# Altium PCB AWSAM_5_Breakout.PcbDoc
Units mm, origin at the board's own origin, x right, y up, seen from the top; angles counter-clockwise.
Board outline 45 x 60 mm, 2 copper layers (Top Layer, Bottom Layer); 37 components, 41 nets, 162 pads, 0 vias.
Unrouted connection lines stored in the file: 87.
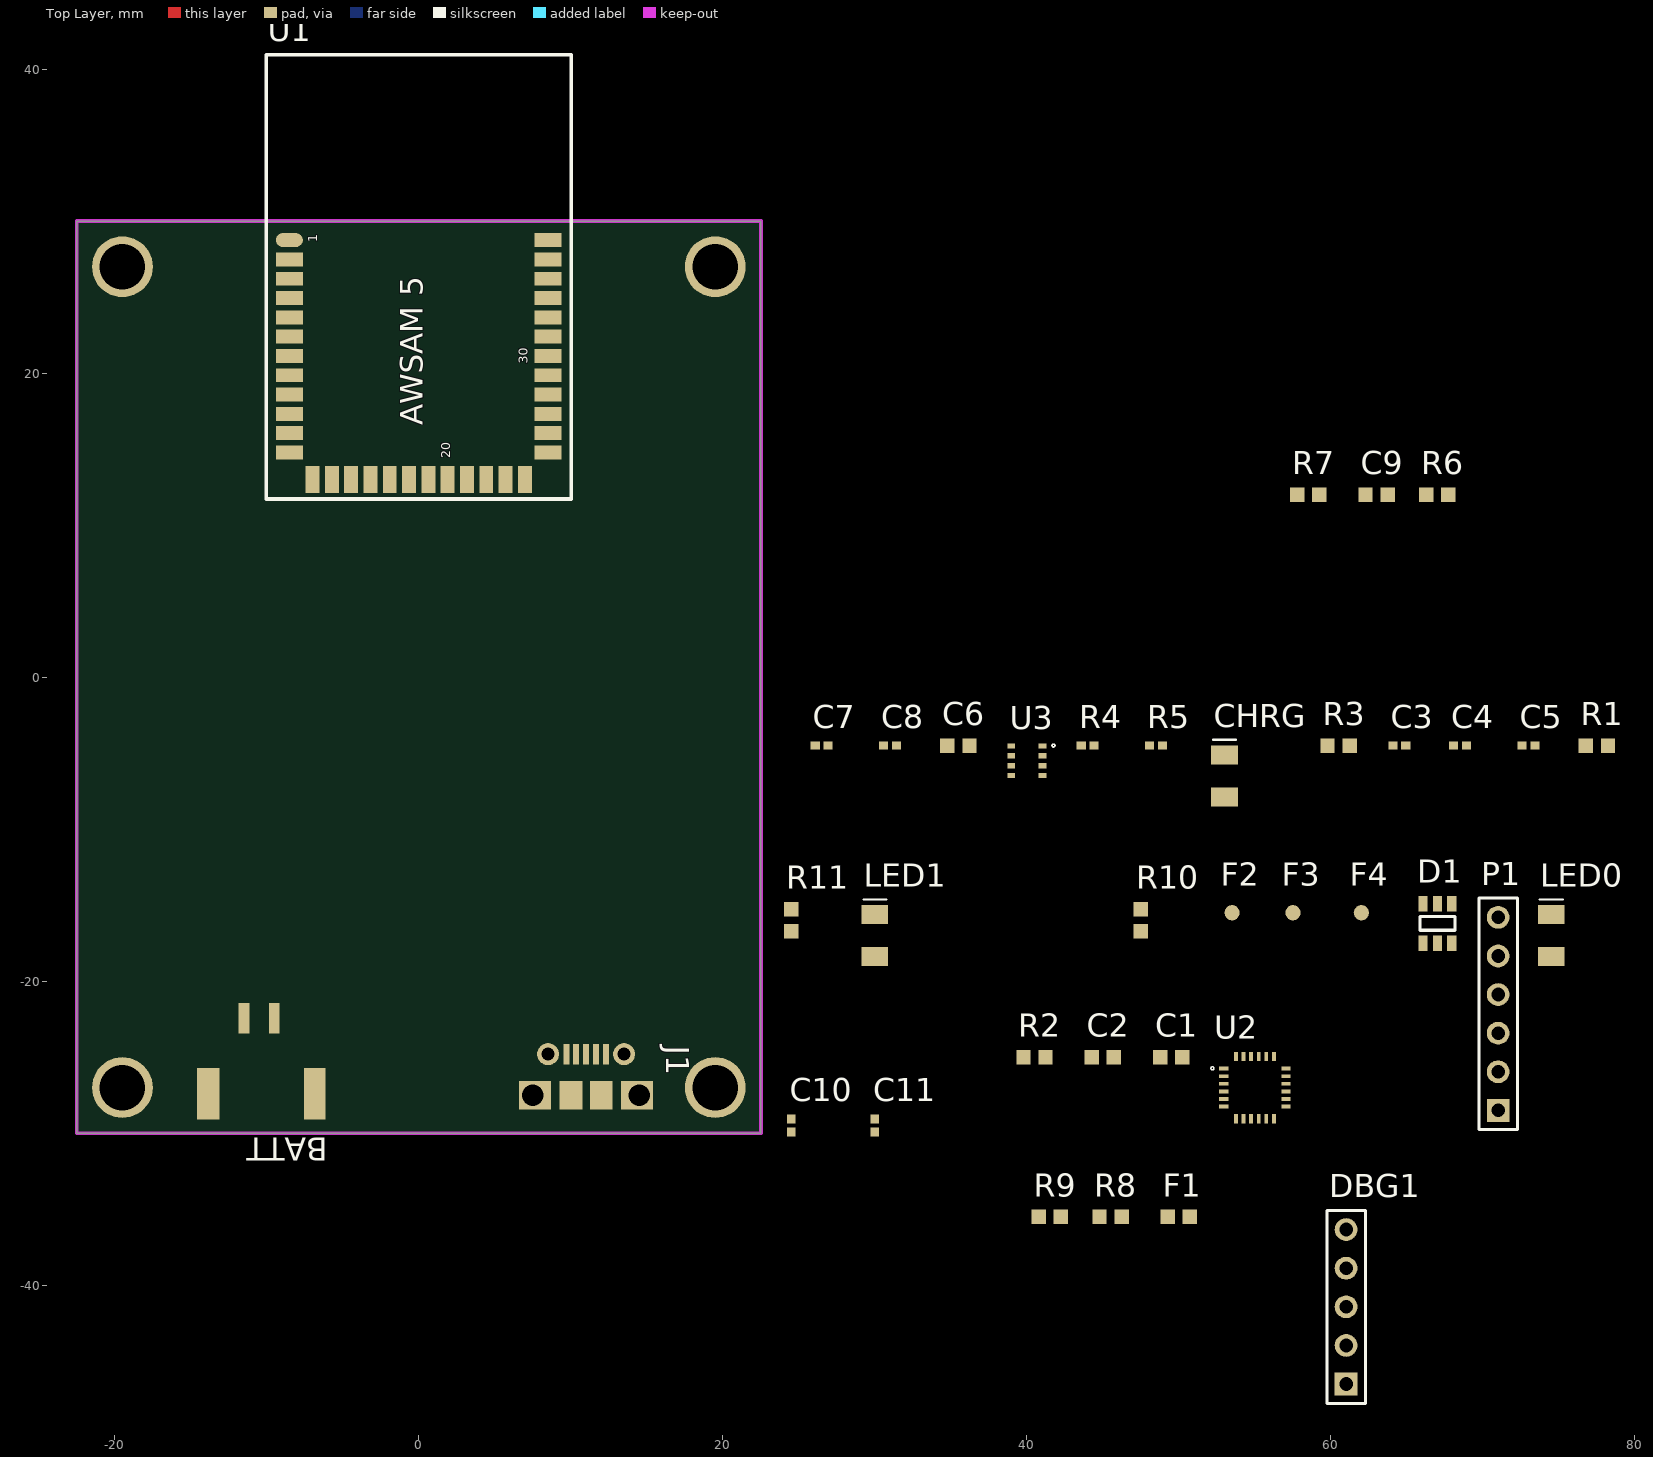
[diagram p0: Top Layer view]
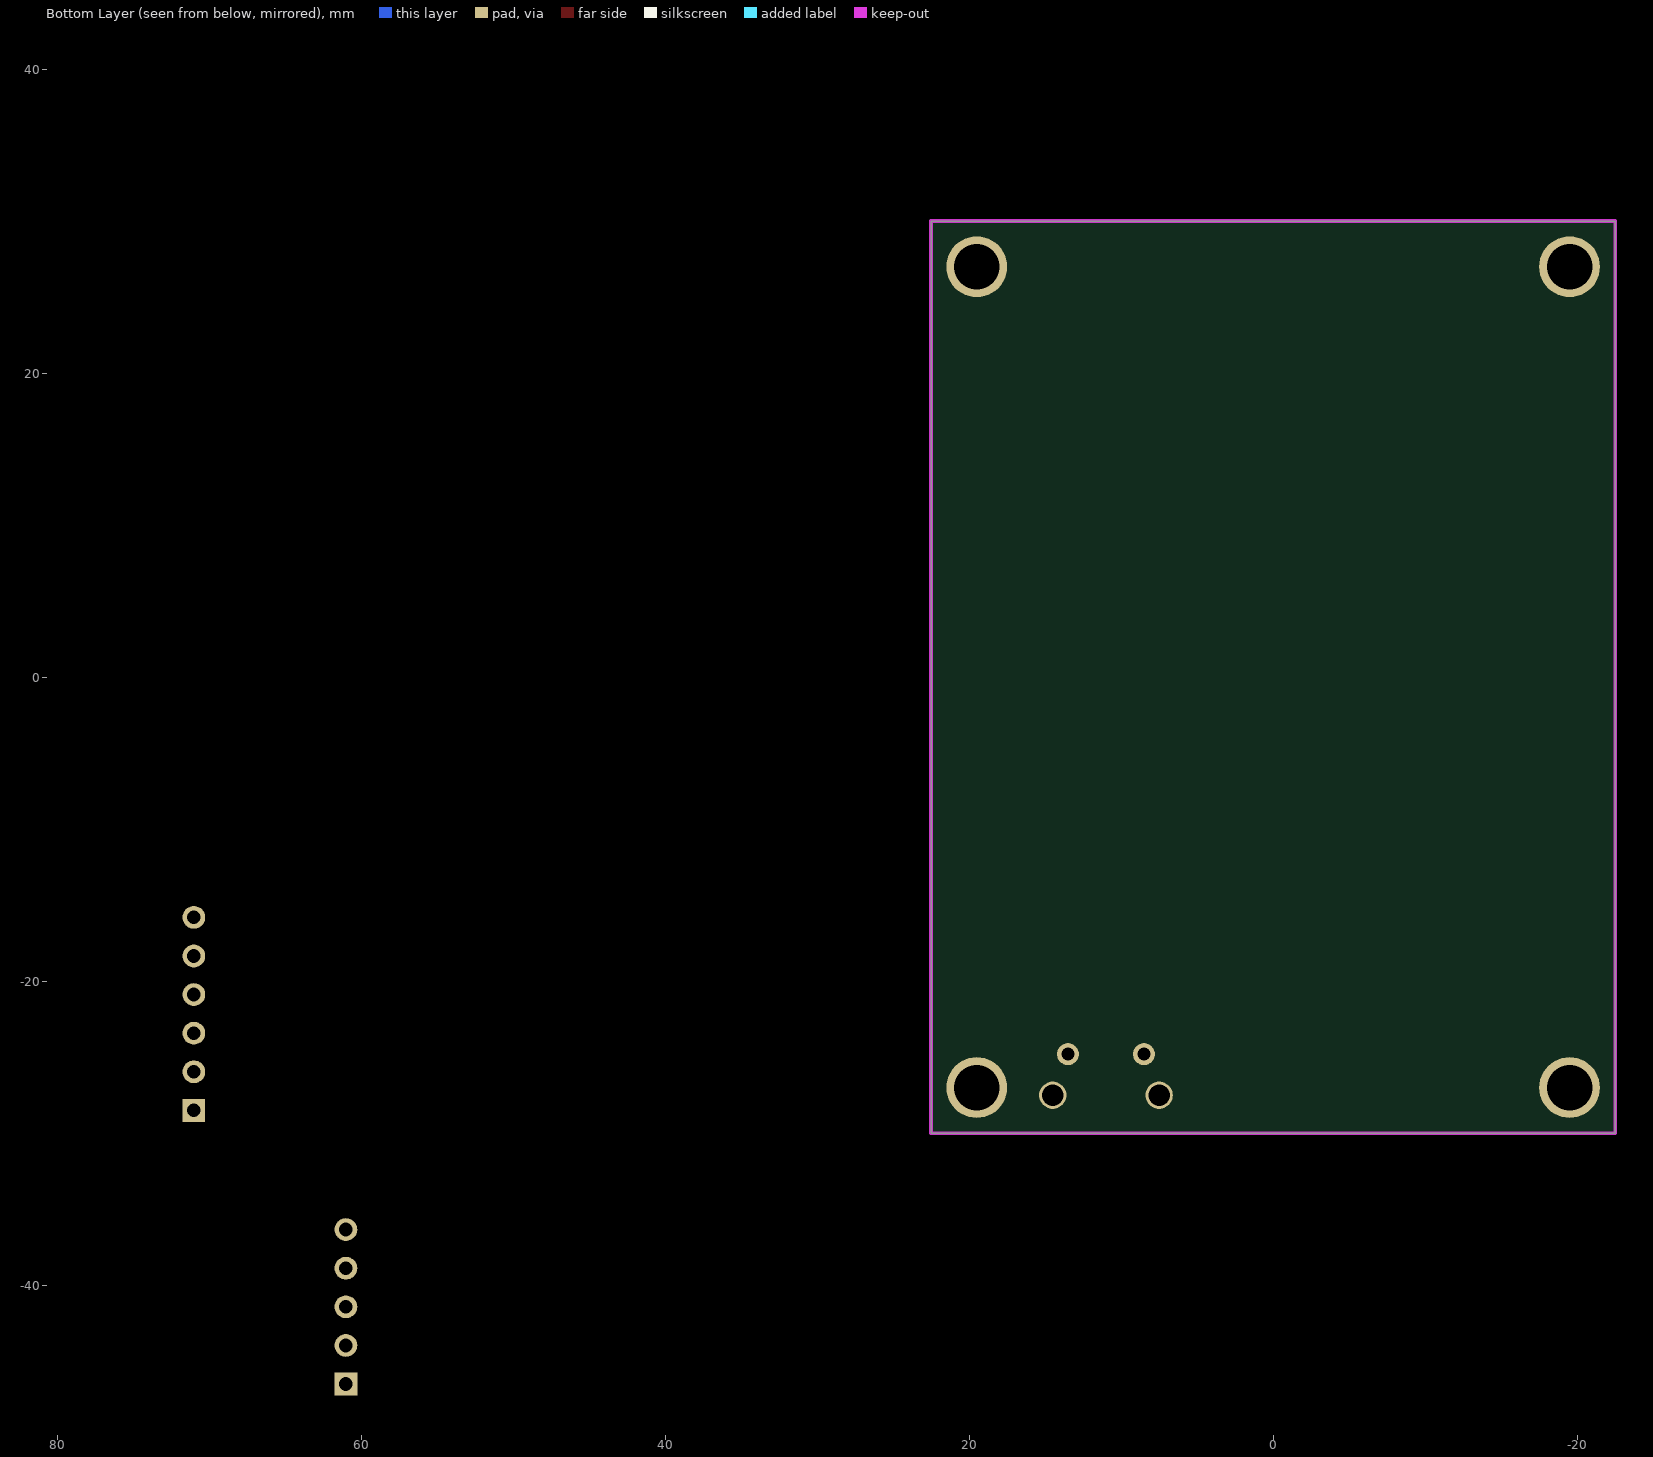
[diagram p1: Bottom Layer view, seen from below]

## Layer stack, top to bottom
Top Solder: solder mask 0.0102, Solder Resist, Dk 3.5
Top Layer: signal copper 0.0356
Dielectric 1: dielectric 0.32, FR-4, Dk 4.8
Bottom Layer: signal copper 0.0356
Bottom Solder: solder mask 0.0102, Solder Resist, Dk 3.5

## Board outline
-22.5,-30 22.5,-30 22.5,30 -22.5,30

## Design rules (kind name [scope] priority, off if disabled: settings)
Clearance [All] p1: gap=0.254
DiffPairsRouting [All] p1: maxlimit=0.254 minlimit=0.254 mostfreqgap=0.254 toplayer_minwidth=0.381 toplayer_maxwidth=0.381 toplayer_prefwidth=0.381 bottomlayer_minwidth=0.381 bottomlayer_maxwidth=0.381 bottomlayer_prefwidth=0.381 maxuncoupledlength=12.7
PolygonConnect [All] p1: connectstyle=Relief reliefconductorwidth=0.254 reliefentries=4 polygonreliefangle="90 Angle" airgapwidth=0.254
RoutingVias [All] p1: holewidth=0.711 width=1.27 viastyle="Through Hole" minholewidth=0.711 minwidth=1.27 maxholewidth=0.711 maxwidth=1.27
SolderMaskExpansion [All] p1: expansion=0.102
Width [All] p1: maxlimit=0.254 minlimit=0.254 preferedwidth=0.254
29 further rules are at their usual default settings.

## Classes and differential pairs
differential pair USB: +USB_P -USB_N

## Components (designator, comment, footprint, x,y, rotation, side; value= is the part's Value field where it differs from the comment)
BATT "JST-PH-2" JST-PH-2POS -10.5,-23.5 r180 top
C1 "CAP" CAP0603 49.499,-25 r0 top
C2 "CAP" CAP0603 44.999,-25 r0 top
C3 "CAP" CAP0402 64.5,-4.5 r0 top
C4 "CAP" CAP0402 68.5,-4.5 r0 top
C5 "CAP" CAP0402 73,-4.5 r0 top
C6 "CAP" CAP0603 35.5,-4.5 r0 top
C7 "CAP" CAP0402 26.5,-4.5 r0 top
C8 "CAP" CAP0402 31,-4.5 r0 top
C9 "CAP" CAP0603 63,12 r0 top
C10 "CAP" CAP0402 24.5,-29.5 r90 top
C11 "CAP" CAP0402 30,-29.5 r90 top
CHRG "RED" SMT1206-LED 53,-6.5 r90 top
D1 "SP0505BAHTG" SOT23-6 67,-17.5 r0 top
DBG1 "" HDR1X5 61,-46.5 r90 top
F1 "Ferrite" SMT0603 50,-35.5 r0 top
F2 "FIDUCIAL" FIDUCIAL-1MM 53.5,-15.5 r0 top
F3 "FIDUCIAL" FIDUCIAL-1MM 57.5,-15.5 r0 top
F4 "FIDUCIAL" FIDUCIAL-1MM 62,-15.5 r0 top
J1 "1050170001" 1050170001 11,-27.5 r0 top
LED0 "RED" SMT1206-LED 74.5,-17 r90 top
LED1 "RED" SMT1206-LED 30,-17 r90 top
P1 "Header 6" HDR1X6 71,-28.5 r90 top
R1 "RES" SMT0603 77.499,-4.5 r0 top
R2 "RES" SMT0603 40.499,-25 r0 top
R3 "Resistor" SMT0603 60.5,-4.5 r0 top
R4 "RES" SMT0402 44,-4.5 r0 top
R5 "RES" SMT0402 48.5,-4.5 r0 top
R6 "RES" SMT0603 67,12 r0 top
R7 "RES" SMT0603 58.5,12 r0 top
R8 "Resistor" SMT0603 45.5,-35.5 r0 top
R9 "Resistor" SMT0603 41.5,-35.5 r0 top
R10 "Resistor" SMT0603 47.5,-16 r90 top
R11 "Resistor" SMT0603 24.5,-16 r90 top
U1 "AWSAM_5" AWSAM_5 8.5,13 r90 top
U2 "MPU-9250" QFN24 54.999,-27 r0 top
U3 "BME280" BME280 40,-5.5 r0 top

## Footprints (in the part's own frame and the unit in brackets; to place one, negate y for a bottom-side part, rotate by r counter-clockwise, add the part's x,y. Pads: shape width x height; smd on the part's side, far side on the other; paste and mask are expansions set on the pad)
1050170001 [mm] "CONN USB MICRO MOLEX MODIFIED FOR DRILL HITS"
  round 1.8 hole 1.4: 0(-3.5,0) 0(3.5,0)
  rect 2.1x1.9 smd: 0(-3.35,0) 0(3.35,0)
  round 1.45 hole 0.85: 0(-2.5,2.7) 0(2.5,2.7)
  rect 1.5x1.9 smd: 0(-1,0) 0(1,0)
  rect 0.4x1.35 smd: 1(-1.3,2.7) 2(-0.65,2.7) 3(0,2.7) 4(0.65,2.7) 5(1.3,2.7)
  body extent -4.1,-2.5 4.1,2.9, height 2.78
AWSAM_5 [mil] "Footprint for AWSAM_5"
  oval 36x70 smd: 1(620,670)
  rect 36x70 smd: 2(570,670) 3(520,670) 4(470,670) 5(420,670) 6(370,670) 7(320,670) 8(270,670) 9(220,670) 10(170,670) 11(120,670) 12(70,670) 25(70,0) 26(120,0) 27(170,0) 28(220,0) 29(270,0) 30(320,0) 31(370,0) 32(420,0) 33(470,0) 34(520,0) 35(570,0) 36(620,0)
  rect 70x36 smd: 13(0,610) 14(0,560) 15(0,510) 16(0,460) 17(0,410) 18(0,360) 19(0,310) 20(0,260) 21(0,210) 22(0,160) 23(0,110) 24(0,60)
  silkscreen extent -50,-60 1100,730, body extent 0,0 1100,685, height 170
BME280 [mm] "BOSH SENSORTECH TEMP/PRESS/HUMID SENSOR"
  rect 0.5x0.35 smd: 1(1.025,0.975) 2(1.025,0.325) 3(1.025,-0.325) 4(1.025,-0.975) 5(-1.025,-0.975) 6(-1.025,-0.325) 7(-1.025,0.325) 8(-1.025,0.975)
  silkscreen extent 1.65,0.9 1.85,1.1, body extent -1.25,-1.25 1.25,1.25, height 0.93
CAP0402 [mm] "0402 foorprint SMT"
  rect 0.6x0.55 smd: 1(-0.425,0) 2(0.425,0)
  body extent -0.5,-0.26 0.5,0.26, height 0.57
CAP0603 [mm]
  rect 0.95x0.95 smd: 1(-0.725,0) 2(0.725,0)
  body extent -0.8,-0.41 0.8,0.41, height 0.57
FIDUCIAL-1MM [mm] "1MM FIDUCAL MARKER"
  round 1 smd mask+0.5: 1(0,0)
HDR1X5 [mm] "Connector; Header; 5 Position"
  rect 1.5x1.5 hole 0.9: 1(0,0)
  round 1.5 hole 0.9: 2(2.54,0) 3(5.08,0) 4(7.62,0) 5(10.16,0)
  silkscreen extent -1.27,-1.27 11.43,1.27
HDR1X6 [mm] "Connector; Header; 6 Position"
  rect 1.5x1.5 hole 0.9: 1(0,0)
  round 1.5 hole 0.9: 2(2.54,0) 3(5.08,0) 4(7.62,0) 5(10.16,0) 6(12.7,0)
  silkscreen extent -1.27,-1.27 13.97,1.27
JST-PH-2POS [mm] "JST-PH 2POS SM R/A 2.0mm"
  rect 1.4x3.4 smd: 0(-3.65,3.9)
  rect 1.5x3.4 smd: 0(3.35,3.9)
  rect 0.7x2 smd: 1(1,-1.05) 2(-1,-1.05)
QFN24 [mm]
  rect 0.6x0.25 smd mask+0.1: 1(-2.05,1.25) 2(-2.05,0.75) 3(-2.05,0.25)
  rect 0.6x0.25 smd mask+0.102: 4(-2.05,-0.25) 5(-2.05,-0.75) 6(-2.05,-1.25) 13(2.05,-1.25) 14(2.05,-0.75) 15(2.05,-0.25) 16(2.05,0.25) 17(2.05,0.75) 18(2.05,1.25)
  rect 0.25x0.6 smd mask+0.102: 7(-1.25,-2.05) 8(-0.75,-2.05) 9(-0.25,-2.05) 10(0.25,-2.05) 11(0.75,-2.05) 12(1.25,-2.05) 19(1.25,2.05) 20(0.75,2.05) 21(0.25,2.05) 22(-0.25,2.05) 23(-0.75,2.05) 24(-1.25,2.05)
  silkscreen extent -2.89,1.17 -2.69,1.37, body extent -2.05,-2.05 2.05,2.05, height 0.95
SMT0402 [mm] "0402 foorprint SMT"
  rect 0.6x0.55 smd: 1(-0.425,0) 2(0.425,0)
  body extent -0.59,-0.25 0.59,0.25, height 2.65
SMT0603 [mm]
  rect 0.95x0.95 smd: 1(-0.725,0) 2(0.725,0)
  body extent -1.02,-0.45 1.03,0.45, height 2.65
SMT1206-LED [mm]
  rect 1.25x1.75 smd: 1(-1.375,0) 2(1.375,0)
  silkscreen extent 2.37,-0.75 2.37,0.75, body extent -1.6,-0.8 1.6,0.8, height 1.78
SOT23-6 [mm] "SOT143-4 as used in SP0503BAHTG"
  round 0.2 on Top Overlay: 1(-1.5,0.75)
  rect 0.6x1 smd: 1(-0.95,0) 2(0,0) 3(0.95,0) 4(-0.95,2.6) 5(0,2.6) 6(0.95,2.6)
  silkscreen extent -1.15,0.85 1.15,1.75, body extent -1.46,0.13 1.46,2.47, height 1

## Part data
BATT: library part S2B-PH-SM4-TB, "CONN SM JST PH 2-POS"
C1 C2: library part CAP-SM-0603-X5R-4.7uF, "CAP SM 0603 X5R 4.7uF"
C3 C5 C7 C8: library part CAP-SM-0402-X7R-100NF, "CAP SM 0402 X7R 100NF"
C4: library part CAP-SM-0402-X7R-10NF, "CAP SM 0402 X7R 10NF"
C6 C9: library part CAP-SM-0603-X5R-10uF, "CAP SM 0603 X5R 10uF"
C10 C11: library part CAP-SM-0402-NP0-10PF, "CAP SM 0402 NP0 10PF"
CHRG LED0 LED1: library part LTST-C150KRKT, "LED SM 1206 RED 2V FWD VOLTAGE"
D1: "IC DIODE TRANS VOLT SUPPR 5 PACKAGE"
DBG1: library part "Header 5", "Header, 5-Pin"
F1: library part FERRITE-SM-0603, "FERRITE SM 0603"
F2 F3 F4: library part FIDUCIAL-1MM, "FIDUCIAL 1MM CENTER"
J1: "CONN RCPT MICRO USB R/A SMD"
P1: "Header, 6-Pin"
R1: library part RES-SM-0603-100K, "RES SM 0603 100K"
R2: library part RES-SM-0603-10K, "RES SM 0603 10K"
R3 R10 R11: library part RES-SM-0603-220R, "RES SM 0603 220R"
R4 R5: library part RES-SM-0402-10K, "RES SM 0402 10K"
R6 R7 R8 R9: library part RES-SM-0603-22K, "RES SM 0603 22K"
U2: "IC 9DOF IMU"
U3: "IC SENSOR PRESS/HUMID/TEMP"

## Free pads (board coordinates)
  round 4 hole 3: 0(-19.5,-27) 0(-19.5,27) 0(19.5,-27) 0(19.5,27)

## Nets (pads, with @x,y where several pads share a name; then routed paths per layer and width w, separated by ;. In a path a pad name is that pad's centre, name@x,y a point inside that pad or via, vN(x,y) a via of type N, cw(c..) or ccw(c..) an arc to the next point about the centre after c; other vN are vias at no path point)
ADC0: P1.2 U1.35
ADC1: P1.3 U1.33
ADC2: P1.4 U1.31
ADC3: R6.1 R7.2 U1.29
BOOT0: U1.27
CHRG: R3.2 U1.4
GND: BATT.1 C1.1 C2.1 C3.1 C4.1 C5.1 C6.1 C7.1 C8.1 C9.1 C10.1 C11.1 CHRG.2 D1.2 DBG1.3 J1.0 J1.5 LED0.2 LED1.2 P1.6 pad.0@19.5,27 R1.1 R2.1 R7.1 U1.5 U1.14 U2.18 U2.20 U3.1 U3.5 U3.7
I2C_SCL: R5.1 U1.19 U3.3
I2C_SDA: R4.1 U1.20 U3.4
LED0: R10.2 U1.36
LED1: R11.2 U1.34
MPU_INT: U2.12
MPU_SYNC: U2.11
NetC5_2: C5.2 U2.10
NetC10_2: C10.2 U1.23
NetC11_2: C11.2 U1.24
NetCHRG_1: CHRG.1 R3.1
NetD1_4: D1.4 F1.1 J1.1
NetLED0_1: LED0.1 R10.1
NetLED1_1: LED1.1 R11.1
NetR1_2: R1.2
NetR2_2: R2.2
NRST: DBG1.5 U1.9
SPI0_CS: U1.15 U2.22
SPI0_MISO: U1.17 U2.9
SPI0_MOSI: U1.18 U2.24
SPI0_SCK: U1.16 U2.23
SPI2_CS: U1.32
SPI2_MISO: U1.28
SPI2_MOSI: U1.26
SPI2_SCK: U1.30
SWCLK: DBG1.2 U1.3
SWDIO: DBG1.4 U1.7
USB_DM: R8.1 U1.11
USB_DP: R9.1 U1.12
USB_N: D1.5 J1.2 R8.2
USB_P: D1.6 J1.3 R9.2
VBAT: BATT.2 C6.2 R6.2
VBATT: C1.2
VCC: C3.2 C4.2 C7.2 C8.2 C9.2 DBG1.1 P1.1 R4.2 R5.2 U1.1 U1.13 U2.1 U2.8 U2.13 U3.2 U3.6 U3.8
VUSB: C2.2 F1.2
pads on no net: BATT.0 D1.1 D1.3 F2.1 F3.1 F4.1 J1.4 P1.5 U1.2 U1.6 U1.8 U1.10 U1.21 U1.22 U1.25 U2.2 U2.3 U2.4 U2.5 U2.6 U2.7 U2.14 U2.15 U2.16 U2.17 U2.19 U2.21

## Keep-outs
Keep-Out Layer:
  the board outline again, w0.254

## Text inside footprints (layer, text, board x,y; h text height)
U1: Top Overlay "30" at 7.357,20.62 h1.02 r90; Top Overlay "20" at 2.277,14.397 h1.02 r90; Top Overlay "1" at -6.486,28.621 h1.02 r90; Top Overlay "AWSAM 5" at 0.753,16.556 h2.54 r90; Mechanical 1 "NO Copper Zone" at 8.373,35.86 h2.54 r180